# Altium PCB versi 1.0(1).PcbDoc (part 2 of 2)
Units mm, origin at the board's own origin, x right, y up, seen from the top; angles counter-clockwise.
Board outline 227.58 x 135.13 mm, 2 copper layers (Top Layer, Bottom Layer); 42 components, 49 nets, 314 pads, 39 vias.
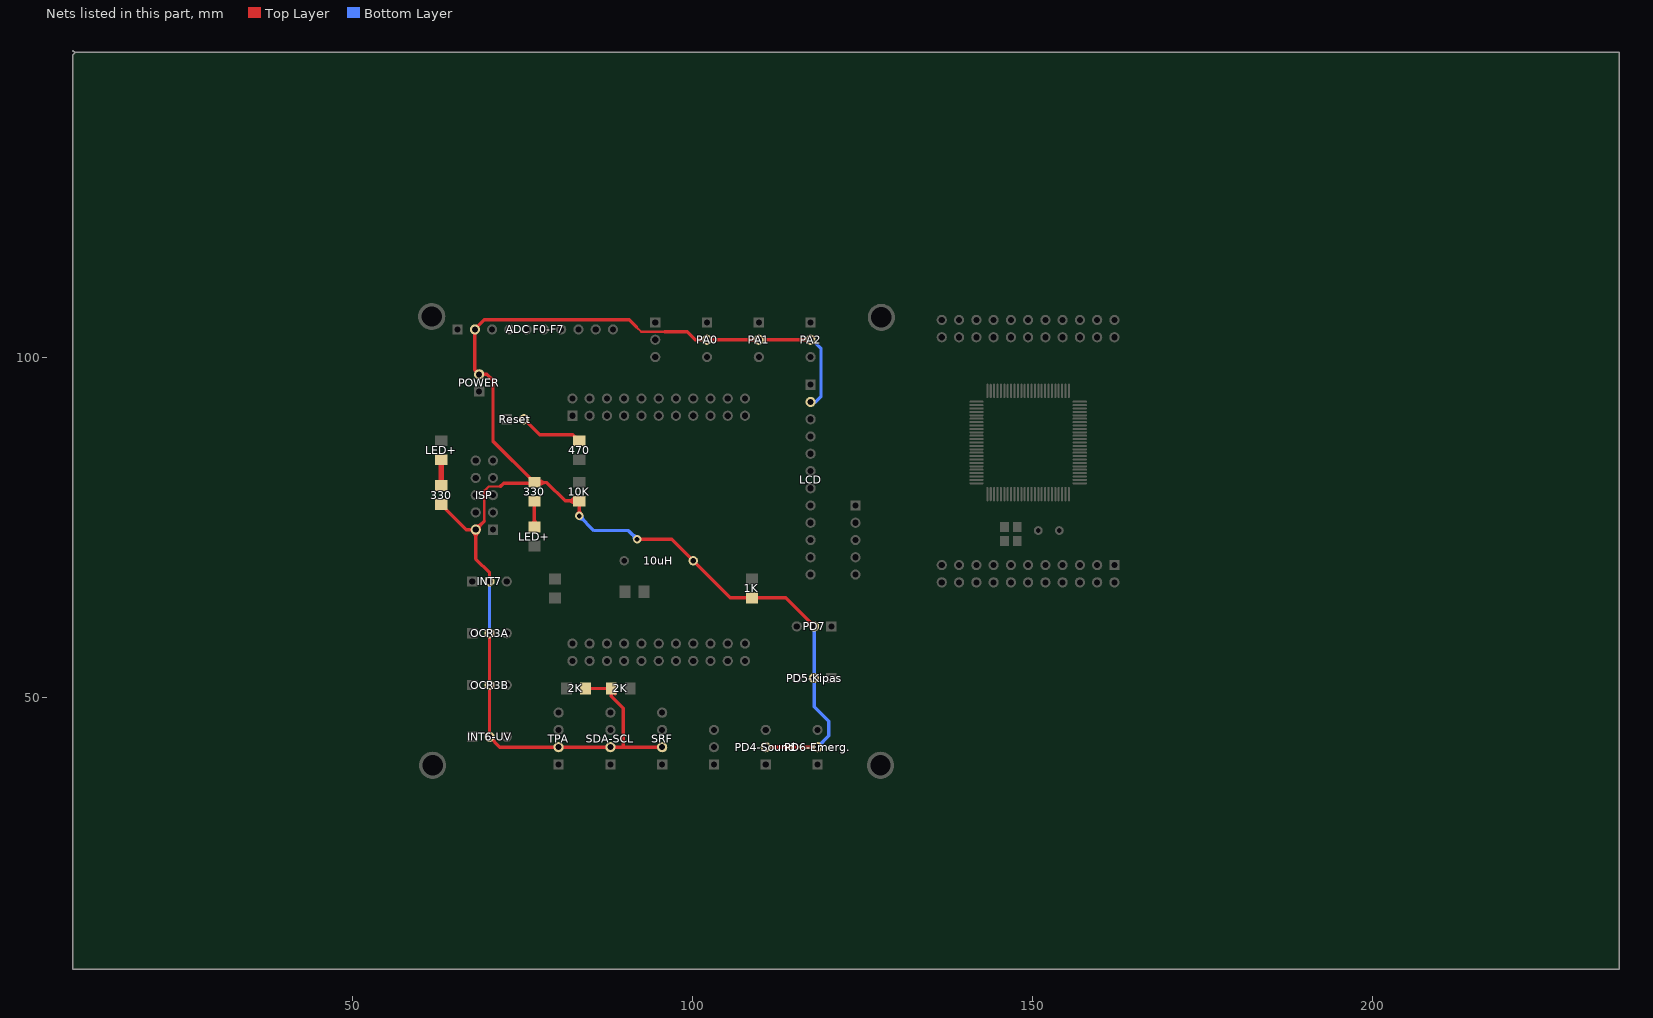
[diagram p2: the nets of this part, all layers, seen from the top]

## Via types
v1: diameter 1.27, hole 0.711, Top Layer to Bottom Layer, 39 vias

## Nets (pads, with @x,y where several pads share a name; then routed paths per layer and width w, separated by ;. In a path a pad name is that pad's centre, name@x,y a point inside that pad or via, vN(x,y) a via of type N, cw(c..) or ccw(c..) an arc to the next point about the centre after c; other vN are vias at no path point) (continued)
NetLed.ISP_1: 330.2@76.708,78.864 LED+.1@76.708,75.06 | length 6.8
  Top Layer w0.5: LED+.1@76.354,75.514 ccw(c75.501,76.367) 76.708,76.367 ccw(c77.915,76.367) LED+.1@77.062,75.514 ; 330.2@76.496,78.702 cw(c75.984,78.19) 76.708,78.19 cw(c77.432,78.19) 330.2@76.92,78.702 ; LED+.1@76.708,75.16 330.2@76.708,78.914
NetLed.Pow_1: 330.1@62.992,81.156 LED+.1@62.992,84.96 | length 3.8
  Top Layer w0.8: 330.1@62.992,81.156 LED+.1@62.992,84.96
NetPower_2: 
NetR.res2_1: 470.1 Reset.2 | length 10.8
  Top Layer w0.5: Reset.2@75.184,90.932 77.47,88.646 82.376,88.646 470.1@83.312,87.71 ; 470.1@82.565,88.457 cw(c82.01,87.902) 470.1@82.751,87.644 ; 470.1@83.128,87.894 cw(c82.846,87.611) 470.1@83.223,87.48
VCC: 1K.2 2K.2 10K.2 10uH.2 330.1@76.708,81.664 330.2@62.992,78.356 "ADC F0-F7.2" INT6-UV.2 INT7.2 ISP.2 LCD.2 OCR3A.2 OCR3B.2 PA0.2 PA1.2 PA2.2 PD4-Sound.2 PD5-Kipas.2 PD6-Emerg..2 PD7.2 POWER.2 SDA-SCL.2 SRF.2 TPA.2 | length 274.2
  Top Layer w0.35: 69.342,75.946 69.342,80.391 69.977,81.026 71.691,81.026 ; 91.694,104.521 92.42,103.795 95.849,103.795
  Top Layer w0.5: 330.2@62.992,78.356 66.672,74.676 ISP.2@68.072,74.676 ; ISP.2@67.718,74.322 cw(c66.865,73.469) 68.072,73.469 cw(c69.279,73.469) ISP.2@68.426,74.322 ; ISP.2@68.072,75.176 ccw(c68.072,76.383) 68.926,75.53 ccw(c69.779,74.676) ISP.2@68.572,74.676 ; 69.342,75.946 ISP.2@68.072,74.676 ; OCR3A.2@69.75,59.59 cw(c68.897,58.737) 70.104,58.737 cw(c71.311,58.737) OCR3A.2@70.458,59.59 ; INT6-UV.2@70.104,44.196 71.628,42.672 TPA.2@80.264,42.672 SDA-SCL.2@87.884,42.672 SRF.2@95.504,42.672 ; INT6-UV.2@70.104,44.831 OCR3A.2@70.104,59.436 ; INT7.2@70.104,67.056 70.104,68.326 68.072,70.358 ISP.2@68.072,74.676 ; 71.691,81.026 72.2,81.534 330.1@76.708,81.534 ; 330.1@76.623,81.699 cw(c76.537,81.614) 330.1@76.658,81.614 ; 330.1@76.708,81.614 78.533,81.614 81.233,78.914 83.312,78.914 v1(83.312,76.708) ; 330.1@76.708,81.664 76.658,81.664 70.612,87.71 70.612,96.647 69.723,97.536 POWER.2@68.58,97.536 67.945,98.171 67.945,104.14 69.342,105.537 90.678,105.537 91.694,104.521 ; 77.67,81.402 cw(c78.182,80.89) 78.182,81.614 cw(c78.182,82.338) 77.67,81.826 ; 82.35,78.702 ccw(c81.838,78.19) 81.838,78.914 ccw(c81.838,79.638) 82.35,79.126 ; v1@83.04,76.98 ccw(c82.383,77.637) 83.312,77.637 ccw(c84.241,77.637) v1@83.584,76.98 ; 10K.2@83.1,78.702 cw(c82.588,78.19) 83.312,78.19 cw(c84.036,78.19) 10K.2@83.524,78.702 ; 2K.2@84.154,51.308 2K.2@87.884,51.308 ; 2K.2@84.366,51.096 cw(c84.878,50.584) 84.878,51.308 cw(c84.878,52.032) 2K.2@84.366,51.52 ; 2K.2@87.846,51.096 ccw(c87.334,50.584) 87.334,51.308 ccw(c87.334,52.032) 2K.2@87.846,51.52 ; 2K.2@87.941,51.248 cw(c87.942,51.244) 2K.2@87.945,51.247 ; 2K.2@88.008,51.308 88.008,50.168 89.789,48.387 89.789,42.672 ; 2K.2@88.025,50.755 cw(c88.14,50.072) 2K.2@88.63,50.562 ; v1(91.821,73.279) 96.901,73.279 10uH.2@100.076,70.104 105.54,64.64 1K.2@108.712,64.64 113.668,64.64 PD7.2@117.856,60.452 ; 95.849,103.795 99.187,103.795 100.366,102.616 PA0.2@102.108,102.616 PA1.2@109.728,102.616 PA2.2@117.348,102.616 ; PD4-Sound.2@110.744,42.672 PD6-Emerg..2@118.364,42.672
  Bottom Layer w0.5: OCR3A.2@70.104,59.436 INT7.2@70.104,67.056 ; v1@83.312,76.323 cw(c83.312,75.394) 83.969,76.051 cw(c84.626,76.708) v1@83.697,76.708 ; v1(83.312,76.708) 85.471,74.549 90.551,74.549 v1(91.821,73.279) ; v1@91.436,73.279 ccw(c90.507,73.279) 91.164,73.936 ccw(c91.821,74.593) v1@91.821,73.664 ; LCD.2@117.348,93.472 118.11,93.472 118.872,94.234 118.872,101.346 117.602,102.616 PA2.2@117.348,102.616 ; PD7.2@117.856,60.452 PD5-Kipas.2@117.856,52.832 117.856,48.641 120.015,46.482 120.015,44.323 PD6-Emerg..2@118.364,42.672
pads on no net: 22pF.1 22pF.2 ATmega2560.1 ATmega2560.2 ATmega2560.3 ATmega2560.4 ATmega2560.5 ATmega2560.6 ATmega2560.7 ATmega2560.8 ATmega2560.9 ATmega2560.10 ATmega2560.11 ATmega2560.12 ATmega2560.13 ATmega2560.14 ATmega2560.15 ATmega2560.16 ATmega2560.17 ATmega2560.18 ATmega2560.19 ATmega2560.20 ATmega2560.21 ATmega2560.22 ATmega2560.23 ATmega2560.24 ATmega2560.25 ATmega2560.26 ATmega2560.27 ATmega2560.28 ATmega2560.29 ATmega2560.30 ATmega2560.31 ATmega2560.32 ATmega2560.33 ATmega2560.34 ATmega2560.35 ATmega2560.36 ATmega2560.37 ATmega2560.38 ATmega2560.39 ATmega2560.40 ATmega2560.41 ATmega2560.42 ATmega2560.43 ATmega2560.44 ATmega2560.45 ATmega2560.46 ATmega2560.47 ATmega2560.48 ATmega2560.49 ATmega2560.50 ATmega2560.51 ATmega2560.52 ATmega2560.53 ATmega2560.54 ATmega2560.55 ATmega2560.56 ATmega2560.57 ATmega2560.58 ATmega2560.59 ATmega2560.60 ATmega2560.61 ATmega2560.62 ATmega2560.63 ATmega2560.64 ATmega2560.65 ATmega2560.66 ATmega2560.67 ATmega2560.68 ATmega2560.69 ATmega2560.70 ATmega2560.71 ATmega2560.72 ATmega2560.73 ATmega2560.74 ATmega2560.75 ATmega2560.76 ATmega2560.77 ATmega2560.78 ATmega2560.79 ATmega2560.80 ATmega2560.81 ATmega2560.82 ATmega2560.83 ATmega2560.84 ATmega2560.85 ATmega2560.86 ATmega2560.87 ATmega2560.88 ATmega2560.89 ATmega2560.90 ATmega2560.91 ATmega2560.92 ATmega2560.93 ATmega2560.94 ATmega2560.95 ATmega2560.96 ATmega2560.97 ATmega2560.98 ATmega2560.99 ATmega2560.100 Header.A.1@162.052,69.469 Header.A.2@159.512,69.469 Header.A.3@156.972,69.469 Header.A.4@154.432,69.469 Header.A.5@151.892,69.469 Header.A.6@149.352,69.469 Header.A.7@146.812,69.469 Header.A.8@144.272,69.469 Header.A.9@141.732,69.469 Header.A.10@139.192,69.469 Header.A.11@136.652,69.469 Header.A.12@162.052,66.929 Header.A.13@159.512,66.929 Header.A.14@156.972,66.929 Header.A.15@154.432,66.929 Header.A.16@151.892,66.929 Header.A.17@149.352,66.929 Header.A.18@146.812,66.929 Header.A.19@144.272,66.929 Header.A.20@141.732,66.929 Header.A.21@139.192,66.929 Header.A.22@136.652,66.929 Header.B.1@136.652,102.997 Header.B.2@139.192,102.997 Header.B.3@141.732,102.997 Header.B.4@144.272,102.997 Header.B.5@146.812,102.997 Header.B.6@149.352,102.997 Header.B.7@151.892,102.997 Header.B.8@154.432,102.997 Header.B.9@156.972,102.997 Header.B.10@159.512,102.997 Header.B.11@162.052,102.997 Header.B.12@136.652,105.537 Header.B.13@139.192,105.537 Header.B.14@141.732,105.537 Header.B.15@144.272,105.537 Header.B.16@146.812,105.537 Header.B.17@149.352,105.537 Header.B.18@151.892,105.537 Header.B.19@154.432,105.537 Header.B.20@156.972,105.537 Header.B.21@159.512,105.537 Header.B.22@162.052,105.537 xtal.1 xtal.2
copper on no net: | length 1192
  Top Layer w0.3: 136.077,66.929 ccw(c134.689,66.929) 135.67,67.911 ccw(c136.652,68.892) 136.652,67.504 ; 136.159,105.241 ccw(c135.636,104.927) 135.636,105.537 ; 136.159,105.833 cw(c135.636,106.147) 135.636,105.537 ; 136.245,69.876 ccw(c135.264,70.857) 136.652,70.857 ccw(c138.04,70.857) 137.059,69.876 ; 136.652,66.929 135.255,68.326 135.255,77.343 137.16,79.248 137.16,89.027 139.636,91.503 141.752,91.503 ; 136.652,69.469 136.652,77.343 140.812,81.503 141.752,81.503 ; 136.652,102.422 cw(c136.652,101.034) 137.634,102.015 cw(c138.615,102.997) 137.227,102.997 ; 136.652,102.997 139.192,100.457 143.637,100.457 143.891,100.203 146.177,100.203 147.193,99.187 147.828,99.187 148.463,98.552 148.463,97.917 147.352,96.806 147.352,95.103 ; 136.652,105.537 135.636,105.537 ; v1@138.247,93.782 cw(c139.033,92.996) 139.033,94.107 cw(c139.033,95.218) v1@138.247,94.432 ; v1@138.303,94.107 139.446,94.107 140.55,93.003 141.752,93.003 ; v1(138.43,83.693) 138.62,83.503 141.752,83.503 ; v1@138.508,83.771 ccw(c139.154,84.417) 139.154,83.503 ; 138.617,105.537 cw(c137.229,105.537) 138.21,104.555 cw(c139.192,103.574) 139.192,104.962 ; v1@138.755,83.368 cw(c139.082,83.041) 139.082,83.503 ; v1@138.755,84.018 ccw(c139.999,85.262) 139.999,83.503 ; 138.785,69.876 ccw(c137.804,70.857) 139.192,70.857 ccw(c140.58,70.857) 139.599,69.876 ; v1@138.811,85.011 cw(c138.811,83.9) 139.596,84.686 cw(c140.382,85.471) v1@139.271,85.471 ; v1(138.811,85.471) 140.279,84.003 141.752,84.003 ; v1@139.065,88.9 139.065,89.408 140.66,91.003 141.752,91.003 ; v1@139.065,89.614 ccw(c139.065,90.111) 139.417,89.76 ; v1(139.065,92.71) 139.319,92.71 139.526,92.503 141.752,92.503 ; v1@139.143,92.788 ccw(c139.83,93.475) 139.83,92.503 ; v1@139.175,89.154 cw(c140.054,89.154) 139.432,89.775 ; 139.192,69.469 139.192,74.93 143.352,79.09 143.352,79.903 ; v1(139.192,97.917) 139.827,97.282 144.272,97.282 144.852,96.702 144.852,95.103 ; 139.192,102.422 cw(c139.192,101.034) 140.174,102.015 cw(c141.155,102.997) 139.767,102.997 ; 139.192,102.997 141.097,101.092 144.018,101.092 144.399,100.711 146.431,100.711 147.447,99.695 148.463,99.695 149.225,98.933 149.225,97.917 147.852,96.544 147.852,95.377 ; 139.192,105.537 138.049,104.394 136.144,104.394 135.255,103.505 135.255,100.203 138.811,96.647 144.018,96.647 144.352,96.313 144.352,95.103 ; v1(139.319,82.042) 140.28,83.003 141.752,83.003 ; v1@139.319,82.502 ccw(c139.319,83.613) 140.104,82.827 ccw(c140.89,82.042) v1@139.779,82.042 ; v1@139.39,92.385 cw(c139.676,92.099) 139.676,92.503 ; v1@139.39,93.035 ccw(c140.675,94.32) 140.675,92.503 ; v1@139.525,89.154 cw(c141.249,89.154) 140.03,90.373 ; 141.325,69.876 ccw(c140.344,70.857) 141.732,70.857 ccw(c143.12,70.857) 142.139,69.876 ; v1@141.606,99.568 143.51,99.568 145.852,97.226 145.852,95.103 ; 141.732,69.469 141.732,76.073 143.51,77.851 144.399,77.851 145.352,78.804 145.352,79.903 ; 141.732,102.422 cw(c141.732,101.034) 142.714,102.015 cw(c143.695,102.997) 142.307,102.997 ; 141.732,102.997 143.002,101.727 144.399,101.727 144.907,101.219 146.812,101.219 147.828,100.203 149.098,100.203 149.86,99.441 149.86,97.79 148.352,96.282 148.352,95.103 ; 141.752,88.503 143.526,88.503 v1(144.399,87.63) ; 141.752,89.003 146.177,89.003 ; v1@142.184,99.116 cw(c143.276,98.024) 143.276,99.568 ; v1@142.184,99.766 ccw(c142.663,100.245) 142.663,99.568 ; v1(143.129,98.298) 143.256,98.425 143.891,98.425 ; 143.352,95.103 143.352,95.981 138.526,95.981 134.62,99.887 134.62,104.521 135.636,105.537 ; v1@143.467,98.61 ccw(c143.891,99.003) 143.891,98.425 ; v1@143.574,98.181 cw(c143.891,98.097) 143.891,98.425 ; 143.852,95.103 143.852,93.384 v1@144.716,92.519 ; 143.865,69.876 ccw(c142.884,70.857) 144.272,70.857 ccw(c145.66,70.857) 144.679,69.876 ; 143.916,93.32 ccw(c144.61,94.015) v1@144.726,93.04 ; v1@143.939,87.63 ccw(c142.828,87.63) 143.614,88.415 ccw(c144.399,89.201) v1@144.399,88.09 ; 144.085,93.151 cw(c143.516,92.583) v1@144.32,92.583 ; 144.272,69.469 144.272,76.835 145.852,78.415 145.852,79.903 145.852,81.351 144.653,82.55 144.653,85.399 145.852,86.598 145.852,88.829 146.939,89.916 152.273,89.916 ; 144.272,102.422 cw(c144.272,101.034) 145.254,102.015 cw(c146.235,102.997) 144.847,102.997 ; 144.272,102.997 145.542,101.727 147.193,101.727 148.209,100.711 150.114,100.711 154.352,96.473 154.352,95.103 ; 145.254,78.706 ccw(c144.957,79.003) 145.377,79.003 ; 145.352,95.103 145.352,96.964 143.891,98.425 ; v1@145.415,98.806 145.415,98.552 146.352,97.615 146.352,95.103 ; v1@145.635,99.002 ccw(c146.156,98.678) 145.723,98.244 ; 145.797,75.472 ccw(c145.492,75.777) 145.923,75.777 ; v1@145.852,82.352 cw(c144.644,81.144) 146.352,81.144 ; 145.862,75.057 145.862,73.025 145.862,71.816 146.812,70.866 146.812,69.469 ; 145.923,75.057 145.923,77.47 146.352,77.899 146.352,79.903 146.352,82.09 v1@146.352,82.344 ; v1@145.933,98.817 ccw(c146.541,98.439) 146.034,97.933 ; v1@146.099,82.599 cw(c145.489,81.989) 146.352,81.989 cw(c146.865,81.989) v1@146.502,82.352 ; 146.405,69.876 ccw(c145.424,70.857) 146.812,70.857 ccw(c148.2,70.857) 147.219,69.876 ; 146.812,102.422 cw(c146.812,101.034) 147.794,102.015 cw(c148.775,102.997) 147.387,102.997 ; 146.812,102.997 148.463,101.346 150.622,101.346 154.852,97.116 154.852,95.103 ; 146.852,79.903 146.852,76.414 147.574,75.692 147.574,74.549 150.85,74.549 ; 146.852,95.103 146.852,97.703 v1@147.066,97.917 ; 146.852,96.237 cw(c149.127,96.237) v1@147.518,97.846 ; 146.852,97.082 cw(c148.282,97.082) v1@147.271,98.093 ; 147.185,76.081 cw(c146.335,75.231) 147.537,75.207 ; 147.352,79.903 147.352,77.311 148.844,75.819 152.68,75.819 153.95,74.549 152.426,73.025 147.562,73.025 ; 147.58,74.925 ccw(c148.487,75.832) 148.487,74.549 ; 147.827,72.76 cw(c148.467,72.12) 148.467,73.025 cw(c148.467,73.93) 147.827,73.29 ; 147.827,75.172 ccw(c149.332,76.677) 149.332,74.549 ; 147.852,79.903 147.852,82.955 150.241,85.344 v1(154.305,85.344) ; 147.852,95.103 147.852,95.377 ; 147.852,96.086 147.852,95.377 ; 148.352,79.903 148.352,82.312 150.114,84.074 v1(153.035,84.074) ; 148.852,79.903 148.852,81.796 150.241,83.185 152.019,83.185 152.908,82.296 ; v1(148.971,77.216) v1@149.225,77.216 ; v1@149.296,76.891 cw(c150.082,76.105) 150.082,77.216 cw(c150.082,78.327) v1@149.296,77.541 ; 149.352,79.903 149.352,81.28 150.114,82.042 v1(151.384,82.042) ; 149.352,102.422 cw(c149.352,101.034) 150.334,102.015 cw(c151.315,102.997) 149.927,102.997 ; 149.352,102.997 150.495,101.854 151.384,101.854 155.352,97.886 155.352,95.103 ; v1@149.479,77.47 v1@149.225,77.216 ; 150.514,74.213 ccw(c149.703,73.402) 149.703,74.549 ccw(c149.703,75.696) 150.514,74.885 ; v1@151.059,81.717 ccw(c150.273,80.931) 150.273,82.042 ccw(c150.273,83.153) v1@151.059,82.367 ; 151.852,79.903 151.852,78.573 150.495,77.216 v1@149.225,77.216 ; 151.892,102.422 cw(c151.892,101.034) 152.874,102.015 cw(c153.855,102.997) 152.467,102.997 ; 151.892,102.997 159.131,95.758 159.131,88.9 158.234,88.003 156.952,88.003 ; v1@152.019,92.456 v1@152.146,92.329 ; v1@152.075,77.541 ccw(c151.405,78.211) 152.352,78.211 ; v1@152.088,93.165 ccw(c152.221,94.047) 152.852,93.416 ; 152.352,78.442 ccw(c153.626,78.442) v1@152.725,77.541 ; 152.352,79.903 152.352,77.645 152.527,77.47 152.273,77.216 v1(152.4,77.216) ; 152.4,82.804 ccw(c152.987,83.391) v1@153.427,82.686 ; v1@152.4,92.964 152.852,93.416 ; v1@152.479,92.71 cw(c153.283,92.71) 152.714,93.278 ; v1@152.71,83.749 ccw(c151.924,82.963) 151.924,84.074 ccw(c151.924,85.185) v1@152.71,84.399 ; 152.712,82.492 ccw(c153.227,83.007) v1@153.612,82.389 ; 152.852,95.103 152.852,93.416 ; 153.023,82.181 ccw(c153.466,82.624) v1@153.797,82.092 ; v1@153.263,82.082 ccw(c152.908,81.895) 152.908,82.296 ; v1@153.263,82.51 cw(c152.908,82.697) 152.908,82.296 ; 153.352,95.103 153.352,90.995 152.273,89.916 ; v1(153.67,82.296) 152.908,82.296 ; 153.852,79.903 153.852,76.907 155.702,75.057 155.702,70.739 154.432,69.469 ; 153.95,74.074 ccw(c153.95,72.927) 153.139,73.738 ccw(c152.328,74.549) 153.475,74.549 ccw(c152.328,74.549) 153.139,75.36 ccw(c153.95,76.171) 153.95,75.024 ; v1@153.98,85.019 ccw(c153.194,84.233) 153.194,85.344 ccw(c153.194,86.455) v1@153.98,85.669 ; v1(154.305,87.757) 155.059,87.003 ; v1@154.318,87.297 cw(c154.348,86.292) 155.059,87.003 ; 154.352,79.903 154.352,77.55 156.972,74.93 156.972,69.469 ; 154.432,66.929 155.702,68.199 157.607,68.199 158.242,68.834 158.242,74.676 154.852,78.066 154.852,79.903 ; 154.432,67.504 ccw(c154.432,68.892) 155.414,67.911 ccw(c156.395,66.929) 155.007,66.929 ; 154.432,70.044 ccw(c154.432,71.432) 155.414,70.451 ccw(c156.395,69.469) 155.007,69.469 ; 154.432,102.422 cw(c154.432,101.034) 155.414,102.015 cw(c156.395,102.997) 155.007,102.997 ; 154.432,102.997 159.893,97.536 159.893,88.773 158.623,87.503 156.952,87.503 ; v1@154.765,87.744 ccw(c155.77,87.714) 155.059,87.003 ; 155.327,79.003 ccw(c155.976,79.003) 155.517,78.544 ; 155.352,79.903 155.352,78.709 160.782,73.279 160.782,68.961 160.02,68.199 158.877,68.199 ; 156.565,69.876 ccw(c155.584,70.857) 156.972,70.857 ccw(c158.36,70.857) 157.379,69.876 ; 156.952,82.503 158.162,82.503 158.877,81.788 162.306,81.788 163.449,82.931 v1(163.449,85.979) ; 156.952,83.003 158.424,83.003 159.004,82.423 161.671,82.423 162.179,82.931 v1(162.179,83.439) ; 156.952,83.503 158.813,83.503 159.258,83.058 160.401,83.058 161.058,83.715 161.163,83.82 v1(161.163,85.217) ; 156.952,84.503 158.829,84.503 159.385,83.947 v1@159.893,83.947 ; 156.952,85.003 158.917,85.003 162.941,89.027 162.941,102.108 ; 156.952,85.503 158.528,85.503 161.925,88.9 161.925,100.584 159.512,102.997 ; 156.952,86.003 158.139,86.003 160.909,88.773 160.909,99.06 156.972,102.997 ; 156.952,86.503 153.654,86.503 152.273,87.884 152.273,89.916 ; 156.952,87.003 155.059,87.003 ; 156.963,66.804 ccw(c157.038,67.867) 157.792,67.114 ; 156.972,66.929 157.607,66.929 158.877,68.199 ; 156.972,102.422 cw(c156.972,101.034) 157.954,102.015 cw(c158.935,102.997) 157.547,102.997 ; 156.988,67.153 ccw(c157.11,68.881) 158.334,67.656 ; 157.013,67.503 ccw(c157.181,69.894) 158.877,68.199 ; 159.512,102.422 cw(c159.512,101.034) 160.494,102.015 cw(c161.475,102.997) 160.087,102.997 ; v1@160.838,84.892 cw(c160.052,84.106) 161.163,84.106 cw(c162.274,84.106) v1@161.488,84.892 ; 162.052,102.997 162.941,102.108 ; 162.094,102.424 cw(c162.172,101.34) 162.941,102.108 ; 162.625,102.955 ccw(c163.709,102.877) 162.941,102.108 ; v1@163.124,85.654 cw(c162.338,84.868) 163.449,84.868 cw(c164.56,84.868) v1@163.774,85.654
  Bottom Layer w0.3: 137.541,92.289 cw(c139.467,92.289) v1@138.22,93.756 ; 137.541,93.045 cw(c138.824,93.045) v1@137.993,94.023 ; 137.556,84.851 cw(c138.787,83.621) v1@138.81,85.361 ; v1(137.922,94.107) 137.541,93.726 137.541,92.329 140.208,89.662 140.208,81.788 146.431,75.565 146.431,72.136 148.082,70.485 148.082,68.199 149.352,66.929 ; 138.063,88.279 cw(c139.065,87.277) v1@139.065,88.694 ; v1@138.105,83.368 cw(c137.626,82.889) 138.303,82.889 ; 138.143,85.438 cw(c138.802,84.779) v1@138.814,85.711 ; 138.303,82.276 cw(c139.847,82.276) v1@138.755,83.368 ; v1@138.303,83.185 138.303,81.28 143.002,76.581 143.002,68.199 144.272,66.929 ; 138.37,88.586 ccw(c137.801,89.154) v1@138.605,89.154 ; v1@138.557,85.471 138.176,85.471 137.287,84.582 137.287,81.026 140.462,77.851 140.462,68.199 141.732,66.929 ; 138.617,66.929 ccw(c137.229,66.929) 138.21,67.911 ccw(c139.192,68.892) 139.192,67.504 ; v1@138.732,97.917 ccw(c137.621,97.917) 138.407,98.702 ccw(c139.192,99.488) v1@139.192,98.377 ; v1@138.811,88.773 138.557,88.773 136.271,86.487 136.271,71.755 137.922,70.104 137.922,68.199 139.192,66.929 ; v1@139.001,92.9 141.859,90.043 141.859,82.042 144.272,79.629 148.59,79.629 150.622,77.597 150.622,76.708 152.019,75.311 152.019,73.279 150.622,71.882 150.622,68.199 151.892,66.929 ; v1@139.065,92.25 cw(c139.065,90.833) 140.067,91.835 ; v1(139.192,97.917) 137.922,99.187 137.922,103.632 138.557,104.267 139.827,104.267 141.097,105.537 141.732,105.537 ; v1@139.319,82.423 v1(139.319,82.042) 139.319,81.534 145.542,75.311 145.542,68.199 146.812,66.929 ; v1@139.429,82.042 ccw(c140.921,82.042) 139.866,80.987 ; v1@139.525,92.71 ccw(c140.329,92.71) 139.76,92.142 ; v1@139.779,82.042 ccw(c142.116,82.042) 140.463,80.39 ; 139.833,104.26 cw(c141.732,102.041) 141.732,104.962 ; 140.264,104.704 cw(c141.732,103.236) 141.732,105.312 ; 140.861,105.301 cw(c141.732,104.431) 141.732,105.662 ; 141.157,66.929 ccw(c139.769,66.929) 140.75,67.911 ccw(c141.732,68.892) 141.732,67.504 ; v1@141.478,99.441 141.859,99.441 141.859,101.092 143.002,102.235 143.002,103.759 143.51,104.267 145.542,104.267 146.812,105.537 ; v1@141.534,99.766 ccw(c140.748,100.552) 141.859,100.552 ccw(c142.97,100.552) v1@142.184,99.766 ; 141.712,98.171 ccw(c141.712,99.715) v1@142.804,98.623 ; 142.325,98.171 cw(c142.325,97.494) v1@142.804,97.973 ; 142.373,104.26 cw(c144.272,102.041) 144.272,104.962 ; 142.804,104.704 cw(c144.272,103.236) 144.272,105.312 ; v1(143.129,98.298) 143.256,98.425 142.875,98.425 142.621,98.171 140.589,98.171 139.573,99.187 139.573,101.219 140.462,102.108 140.462,103.505 141.224,104.267 142.367,104.267 143.637,105.537 144.272,105.537 ; 143.401,105.301 cw(c144.272,104.431) 144.272,105.662 ; 143.697,66.929 ccw(c142.309,66.929) 143.29,67.911 ccw(c144.272,68.892) 144.272,67.504 ; v1@144.074,87.305 cw(c143.288,86.519) 144.399,86.519 cw(c145.51,86.519) v1@144.724,87.305 ; v1@144.399,88.018 v1(144.399,87.63) 144.399,84.836 146.812,82.423 147.447,82.423 ; 144.78,91.948 144.78,92.456 152.273,92.456 154.305,90.424 v1(154.305,87.757) 154.305,87.376 151.765,87.376 147.447,83.058 147.447,82.423 ; v1@145.105,92.258 cw(c145.584,91.779) 145.584,92.456 ; v1@145.105,92.908 ccw(c146.197,94) 146.197,92.456 ; 145.122,84.113 cw(c143.687,82.677) v1@145.717,82.677 ; v1(145.542,99.06) 148.082,101.6 148.082,104.267 149.352,105.537 ; v1@145.542,99.52 ccw(c145.542,100.631) 146.327,99.845 ccw(c147.113,99.06) v1@146.002,99.06 ; 145.72,83.515 cw(c144.882,82.677) v1@146.067,82.677 ; 146.237,66.929 ccw(c144.849,66.929) 145.83,67.911 ccw(c146.812,68.892) 146.812,67.504 ; 146.237,105.537 cw(c144.849,105.537) 145.83,104.555 cw(c146.812,103.574) 146.812,104.962 ; v1@146.271,82.734 ccw(c146.824,83.071) 146.824,82.423 ; v1@146.57,82.916 ccw(c147.447,83.449) 147.447,82.423 ; v1(147.193,98.171) 150.622,101.6 150.622,104.267 151.892,105.537 ; v1@147.193,98.631 ccw(c147.193,99.742) 147.978,98.956 ccw(c148.764,98.171) v1@147.653,98.171 ; v1@148.646,76.891 cw(c147.86,76.105) 148.971,76.105 cw(c150.082,76.105) v1@149.296,76.891 ; 148.777,66.929 ccw(c147.389,66.929) 148.37,67.911 ccw(c149.352,68.892) 149.352,67.504 ; 148.777,105.537 cw(c147.389,105.537) 148.37,104.555 cw(c149.352,103.574) 149.352,104.962 ; 148.971,70.932 ccw(c150.815,70.932) 149.511,69.628 ; 148.971,71.777 ccw(c151.66,71.777) 149.759,69.876 ; v1(148.971,77.216) 148.971,69.85 149.352,69.469 149.606,69.723 ; 150.295,92.456 ccw(c150.295,94.434) v1@151.694,93.035 ; 151.14,92.456 ccw(c151.14,93.589) v1@151.941,92.788 ; 151.317,66.929 ccw(c149.929,66.929) 150.91,67.911 ccw(c151.892,68.892) 151.892,67.504 ; 151.317,105.537 cw(c149.929,105.537) 150.91,104.555 cw(c151.892,103.574) 151.892,104.962 ; v1@151.384,81.582 cw(c151.384,80.471) 152.169,81.257 cw(c152.955,82.042) v1@151.844,82.042 ; v1(151.384,82.042) 155.702,77.724 155.702,68.834 156.464,68.072 158.369,68.072 159.512,66.929 ; 151.892,69.469 152.654,70.231 152.654,76.708 v1@152.4,76.962 ; v1@152.019,92.25 cw(c152.019,91.139) 152.804,91.925 cw(c153.59,92.71) v1@152.479,92.71 ; v1@152.075,76.891 cw(c150.676,75.492) 152.654,75.492 ; 152.275,87.376 ccw(c152.275,89.787) 153.98,88.082 ccw(c153.194,88.868) 154.305,88.868 ccw(c155.416,88.868) v1@154.63,88.082 ; v1@152.322,77.138 cw(c151.521,76.337) 152.654,76.337 ; v1@153.035,83.614 cw(c153.035,81.277) 154.687,82.93 ; v1@153.035,83.964 cw(c153.035,82.472) 154.09,83.527 ; v1(153.035,84.074) 153.543,84.074 159.512,78.105 159.512,69.469 ; 153.12,87.376 ccw(c153.12,88.942) v1@154.227,87.835 ; v1@153.67,81.836 cw(c153.67,80.725) 154.455,81.511 cw(c155.241,82.296) v1@154.13,82.296 ; v1(153.67,82.296) 158.242,77.724 158.242,68.961 159.004,68.199 160.782,68.199 162.052,66.929 ; v1@154.305,84.884 cw(c154.305,83.773) 155.09,84.559 cw(c155.876,85.344) v1@154.765,85.344 ; v1(154.305,85.344) 162.052,77.597 162.052,69.469 ; 154.432,104.962 cw(c154.432,103.574) 155.414,104.555 cw(c156.395,105.537) 155.007,105.537 ; 154.432,105.537 155.702,104.267 155.702,96.901 159.385,93.218 159.385,85.344 159.893,84.836 v1@159.893,84.074 ; 156.972,104.962 cw(c156.972,103.574) 157.954,104.555 cw(c158.935,105.537) 157.547,105.537 ; 156.972,105.537 158.242,104.267 158.242,95.504 160.147,93.599 160.147,86.233 v1(161.163,85.217) ; 158.937,66.929 ccw(c157.549,66.929) 158.53,67.911 ccw(c159.512,68.892) 159.512,67.504 ; 159.105,69.876 ccw(c158.124,70.857) 159.512,70.857 ccw(c160.9,70.857) 159.919,69.876 ; 159.405,85.324 cw(c158.652,84.572) v1@159.662,84.236 ; 159.512,104.962 cw(c159.512,103.574) 160.494,104.555 cw(c161.475,105.537) 160.087,105.537 ; 159.512,105.537 160.782,104.267 160.782,87.376 162.306,85.852 v1@162.306,83.439 ; 159.805,84.924 cw(c159.253,84.372) v1@159.994,84.125 ; v1@160.703,85.217 ccw(c159.592,85.217) 160.378,86.002 ccw(c161.163,86.788) v1@161.163,85.677 ; 161.477,66.929 ccw(c160.089,66.929) 161.07,67.911 ccw(c162.052,68.892) 162.052,67.504 ; 161.645,69.876 ccw(c160.664,70.857) 162.052,70.857 ccw(c163.44,70.857) 162.459,69.876 ; v1@161.854,83.764 ccw(c160.762,84.856) 162.306,84.856 ; 162.052,104.962 cw(c162.052,103.574) 163.034,104.555 cw(c164.015,105.537) 162.627,105.537 ; 162.052,105.537 163.322,104.267 163.322,86.233 v1@163.576,85.979 ; 162.306,84.243 ccw(c162.983,84.243) v1@162.504,83.764 ; v1@163.124,86.304 ccw(c162.645,86.783) 163.322,86.783 ; 163.322,87.396 ccw(c164.866,87.396) v1@163.774,86.304
  other v1: 146.177,82.677 159.766,84.201 139.065,89.154 144.78,92.583 152.019,92.71 141.796,99.441

## Other copper
Bottom Layer:
  region: 143.51,93.345 155.194,93.345 155.194,87.376 152.019,84.709 148.209,81.661 143.51,81.661
Multi-Layer:
  lines w0.254: 54.356,38.862 54.864,37.338 ; 54.356,107.061 54.864,108.585 ; 54.61,37.338 55.118,37.338 ; 54.61,108.585 55.118,108.585 ; 54.864,65.065 54.864,37.338 ; 54.864,80.858 54.864,108.585 ; 55.372,38.862 54.864,37.338 ; 55.372,107.061 54.864,108.585 ; 59.055,34.671 59.055,35.179 ; 60.579,34.417 59.055,34.925 ; 60.579,35.433 59.055,34.925 ; 86.782,34.925 59.055,34.925 ; 102.575,34.925 130.302,34.925 ; 128.778,34.417 130.302,34.925 ; 128.778,35.433 130.302,34.925 ; 130.302,34.671 130.302,35.179 ; 132.461,64.135 132.461,108.331 166.243,108.331 166.243,64.135 132.461,64.135
  lines w0.5: 59.055,37.338 59.055,108.585 130.302,108.585 130.302,37.338 59.055,37.338
  text "71.247 (mm)" at 55.778,65.319 h1.52 r90
  text "71.247 (mm)" at 87.036,34.011 h1.52

## Silkscreen, mask and mechanical layers (free items; w line width, h text height)
Top Overlay:
  lines w0.254: 132.461,61.976 132.461,62.484 ; 133.985,61.722 132.461,62.23 ; 133.985,62.738 132.461,62.23 ; 141.328,62.23 132.461,62.23 ; 157.376,62.23 166.243,62.23 ; 164.719,61.722 166.243,62.23 ; 164.719,62.738 166.243,62.23 ; 166.243,61.976 166.243,62.484 ; 168.148,65.659 168.656,64.135 ; 168.148,106.807 168.656,108.331 ; 168.402,64.135 168.91,64.135 ; 168.402,108.331 168.91,108.331 ; 168.656,78.336 168.656,64.135 ; 168.656,94.13 168.656,108.331 ; 169.164,65.659 168.656,64.135 ; 169.164,106.807 168.656,108.331 ; 78.105,52.451 78.105,96.647 111.887,96.647 111.887,52.451 78.105,52.451
  text "^" at 164.338,89.408 h1.52
  text "|" at 164.846,88.773 h1.52
  text "44.196 (mm)" at 169.57,78.59 h1.52 r90
  text "ATmega2560" at 88.646,76.327 h1.52
  text "^" at 109.601,75.819 h1.52
  text "|" at 110.109,75.184 h1.52
  text "v1.0" at 63.881,68.199 h1.52 r90
  text "33.782 (mm)" at 141.582,61.316 h1.52
  text "Revenant" at 63.754,43.942 h3 r90
  text "Ket: Double layer, trough hole, masking+overlay" at 79.883,27.178 h4

## Text inside footprints (layer, text, board x,y; h text height)
Header.A: Top Overlay "1" at 109.982,58.547 h1 r180; Top Overlay "12" at 111.379,56.007 h1 r180; Top Overlay "11" at 80.772,58.42 h1 r180; Top Overlay "22" at 80.772,55.88 h1 r180
Header.A: Top Overlay "22" at 135.128,67.437 h1 r180; Top Overlay "11" at 135.128,69.977 h1 r180; Top Overlay "12" at 165.608,67.437 h1 r180; Top Overlay "1" at 164.084,69.977 h1 r180
Header.B: Top Overlay "22" at 109.22,93.472 h1; Top Overlay "11" at 109.22,90.932 h1; Top Overlay "12" at 78.74,93.472 h1; Top Overlay "1" at 80.264,90.932 h1
Header.B: Top Overlay "22" at 163.576,105.029 h1; Top Overlay "11" at 163.576,102.489 h1; Top Overlay "12" at 133.096,105.029 h1; Top Overlay "1" at 134.62,102.489 h1
ISP: Top Overlay "2" at 68.58,72.136 h1 r90; Top Overlay "1" at 71.12,72.644 h1 r90; Top Overlay "9" at 71.12,86.36 h1 r90; Top Overlay "10" at 68.072,86.36 h1 r90